# Altium PCB PCB2.PcbDoc
Units mm, origin at the board's own origin, x right, y up, seen from the top; angles counter-clockwise.
Board outline 50 x 50 mm, 2 copper layers (Top Layer, Bottom Layer); 59 components, 46 nets, 220 pads, 53 vias.
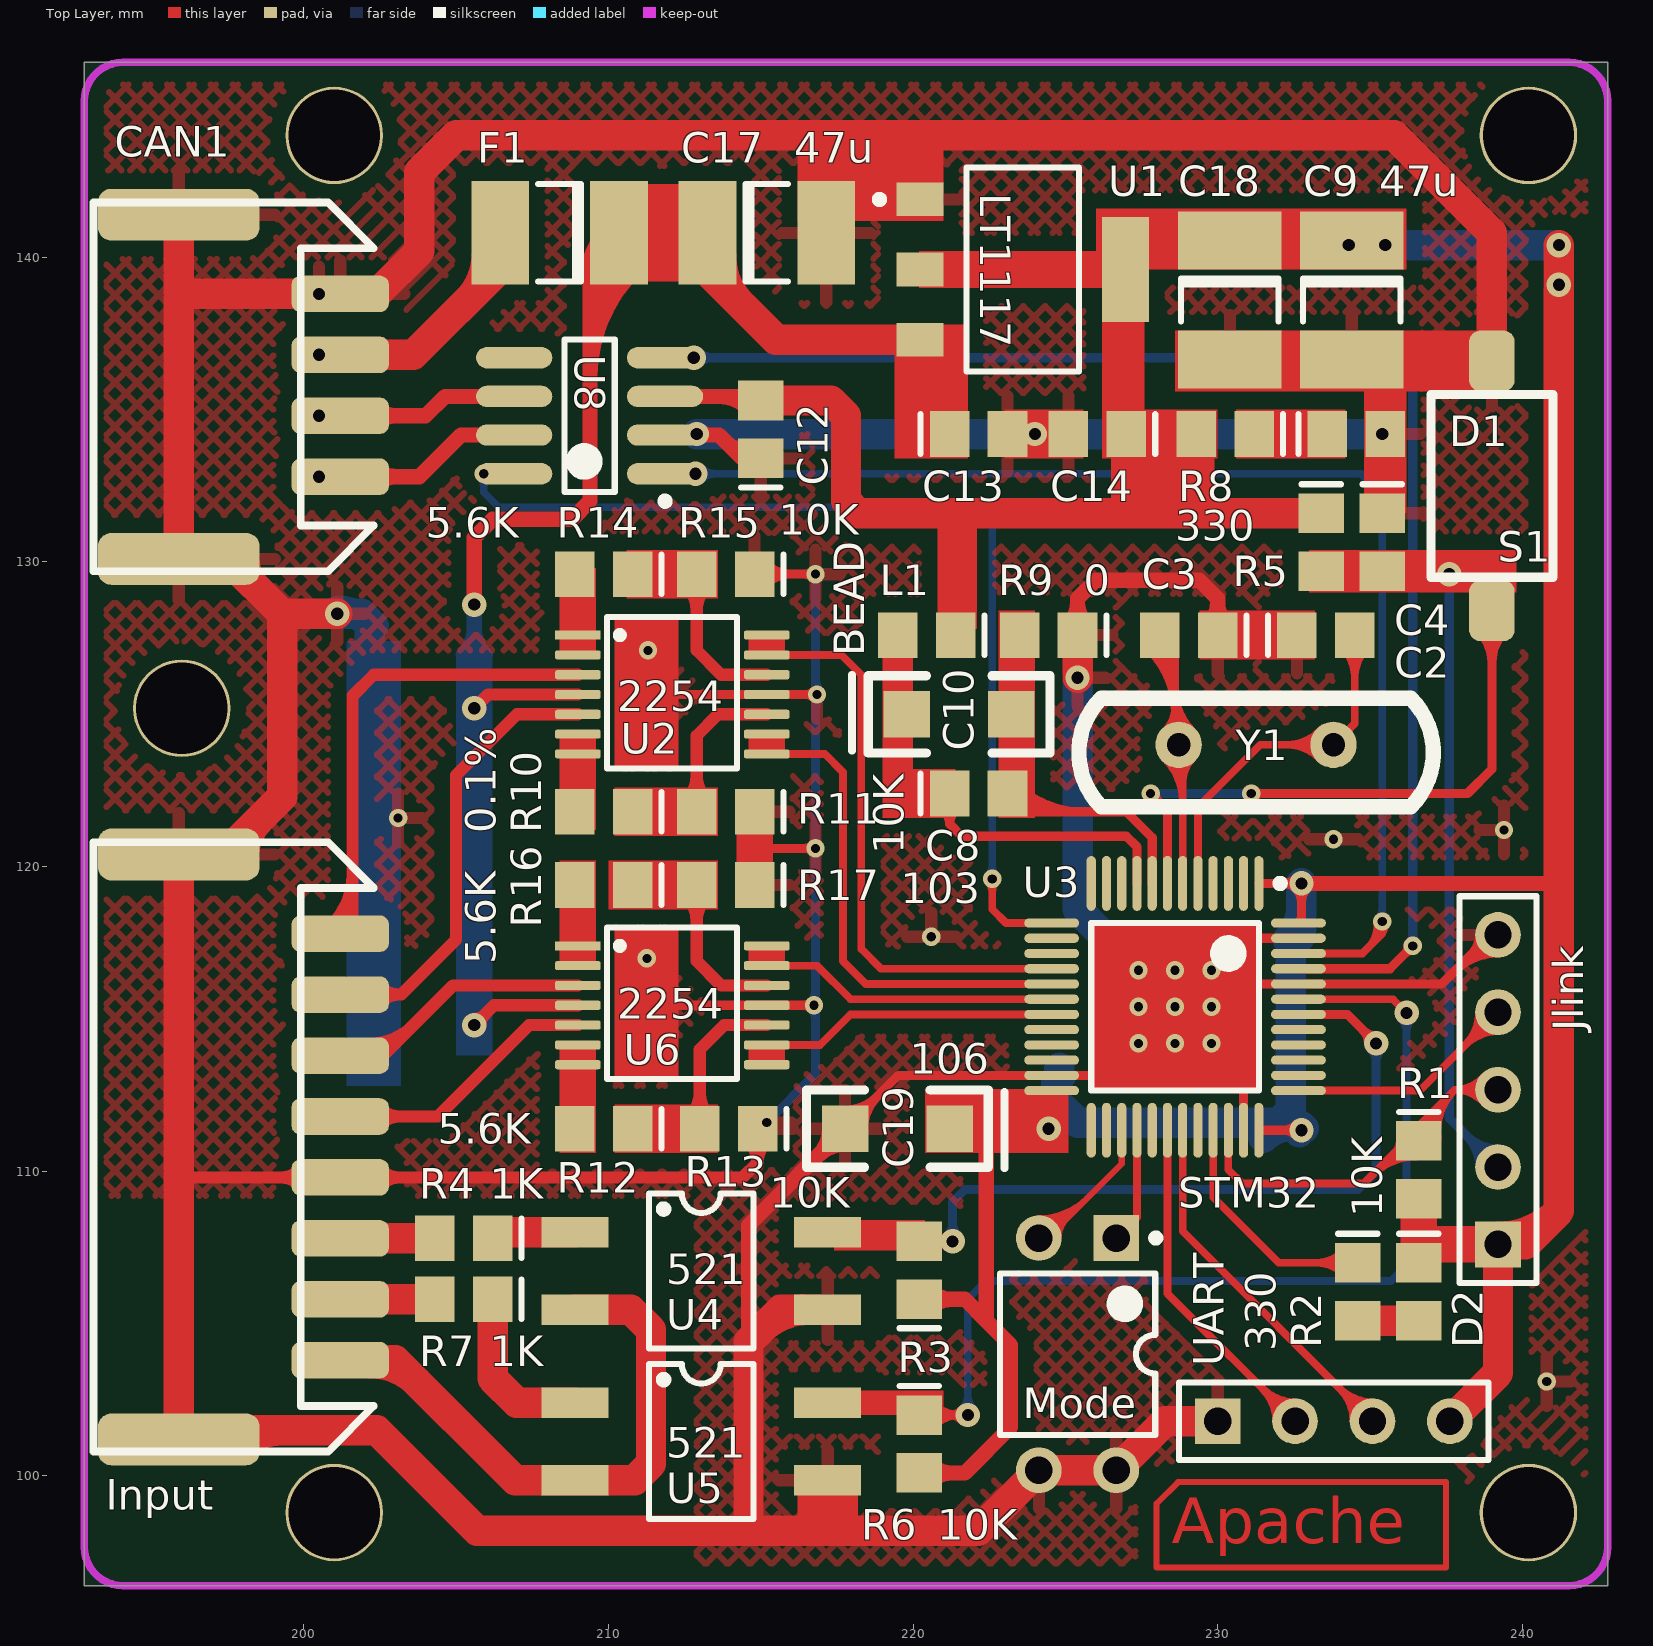
[diagram p0: Top Layer view]
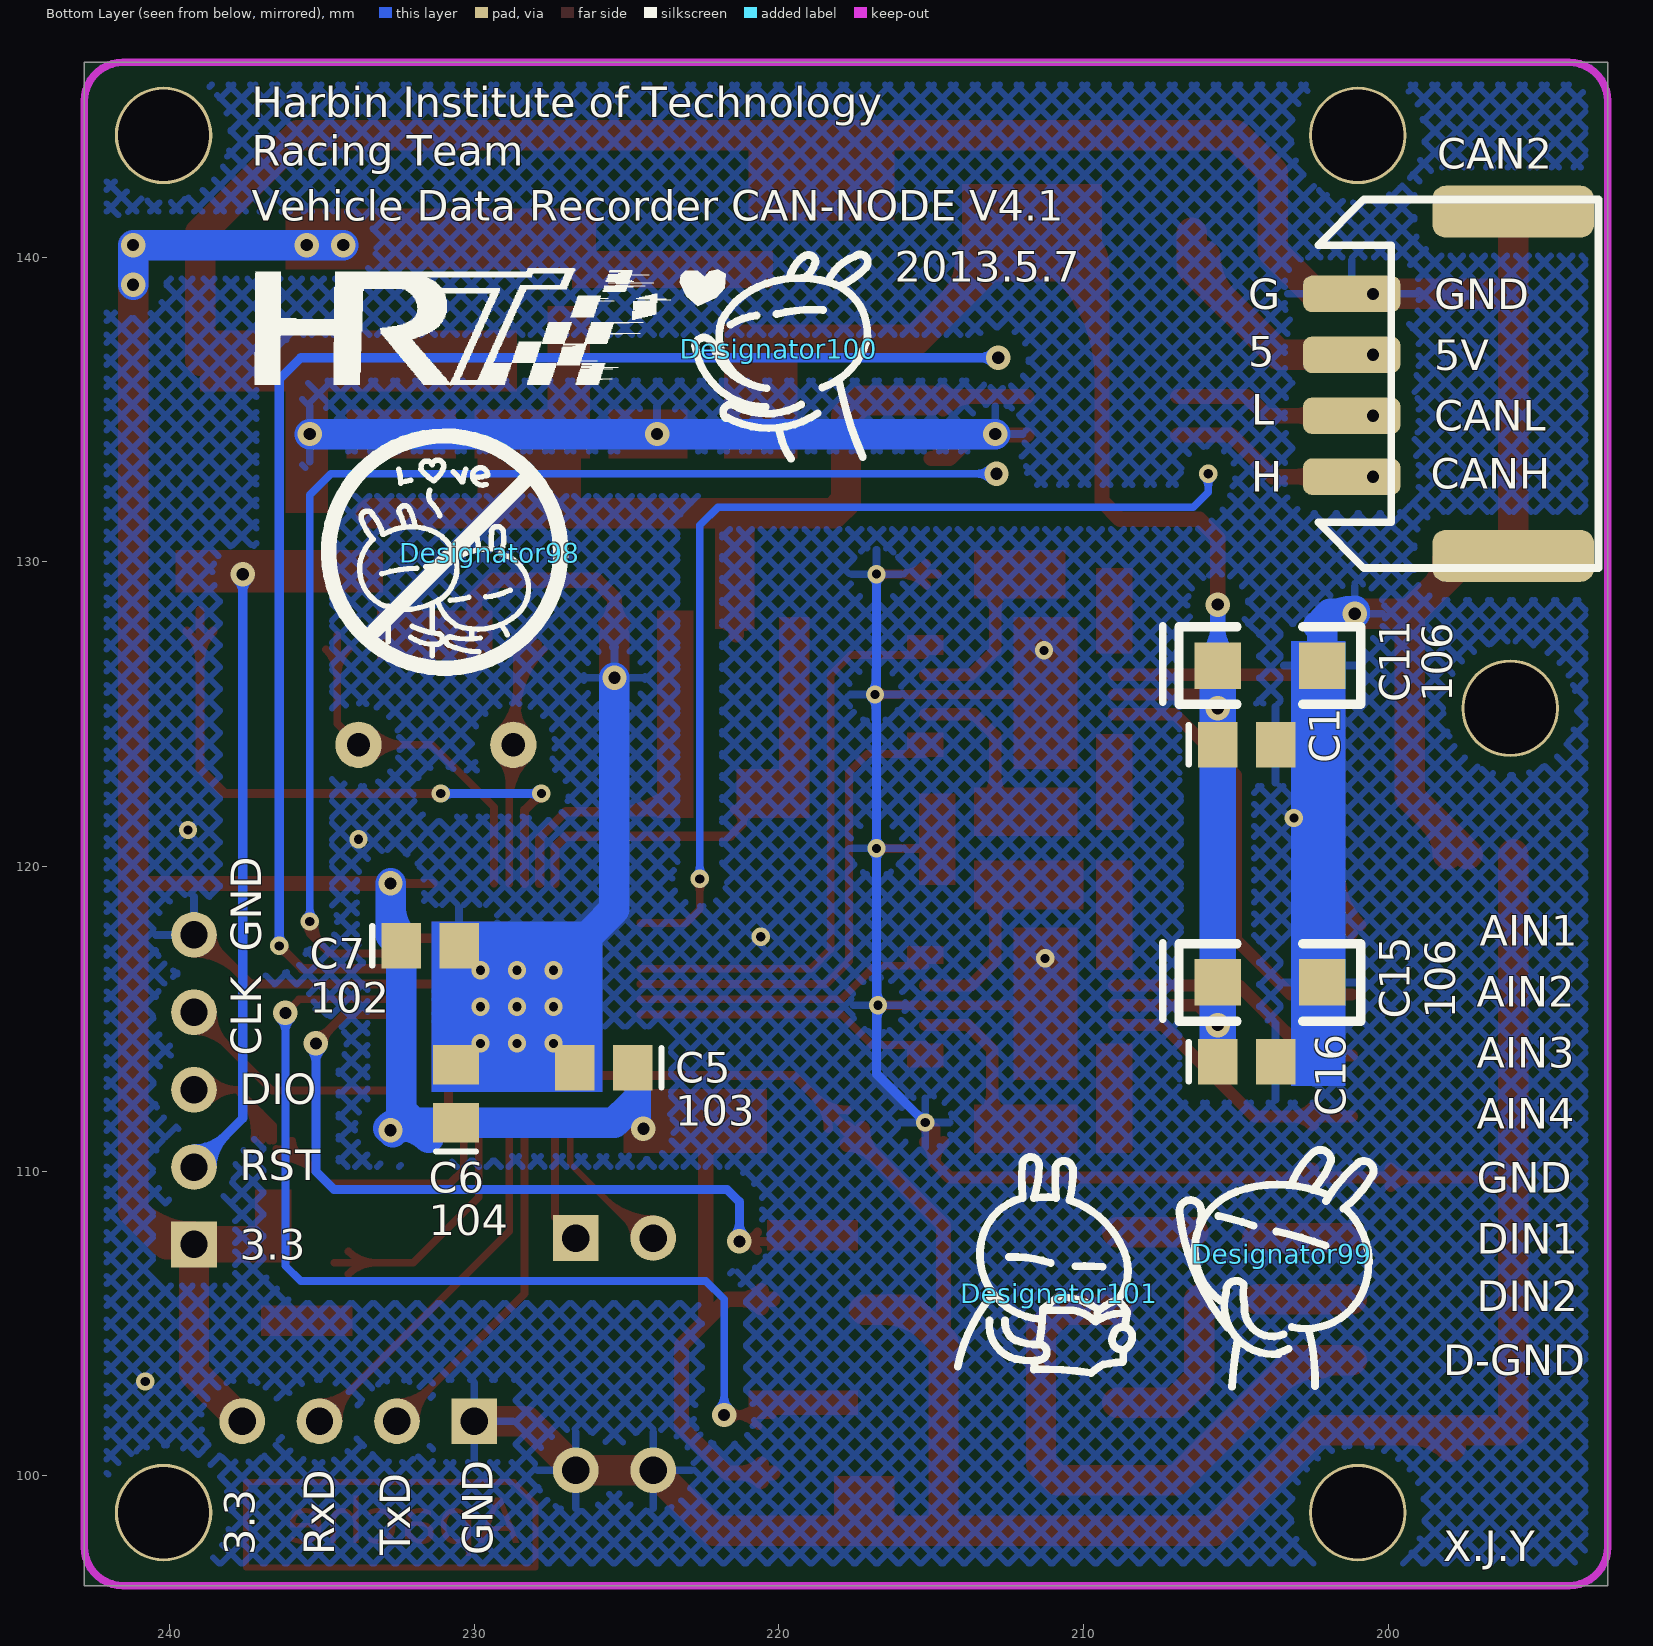
[diagram p1: Bottom Layer view, seen from below]

## Layer stack, top to bottom
Top Layer: signal copper 0.0356
Dielectric: dielectric 0.32, FR-4, Dk 4.8
Bottom Layer: signal copper 0.0356

## Board outline
192.8,146.4 242.8,146.4 242.8,96.4 192.8,96.4

## Design rules (kind name [scope] priority, off if disabled: settings)
Clearance Clearance_1 [(InPolygon)] p1: gap=0.5
Clearance [All] p2: gap=0.2
PolygonConnect [All] p1: connectstyle=Relief reliefconductorwidth=0.4 reliefentries=4 polygonreliefangle="90 Angle"
RoutingVias [All] p1: holewidth=0.5 width=1.2 viastyle="Through Hole" minholewidth=0.3 minwidth=0.8 maxholewidth=1 maxwidth=1.5
SilkscreenOverComponentPads [All] p1: minsilkscreentomaskgap=0.254
SolderMaskExpansion [All] p1: expansion=0.102
Width [All] p1: maxlimit=2.54 minlimit=0.178 preferedwidth=0.254
27 further rules are at their usual default settings.

## Components (designator, comment, footprint, x,y, rotation, side; value= is the part's Value field where it differs from the comment)
C1 "Cap" C0805 205.6,124 r180 bottom
C2 "Cap" C0805 232.6,127.6 r0 top
C3 "Cap" C0805 230,127.6 r180 top
C4 "Cap" C0805 235.4,131.6 r270 top
C5 "Cap" C0805 224.8,113.4 r0 bottom
C6 "Cap" C0805 230.6,111.6 r90 bottom
C7 "Cap" C0805 232.4,117.4 r180 bottom
C8 "Cap" C0805 221.2,122.4 r0 top
C9 "Cap Pol2" 1812 234.4,138.6 r270 top
C10 "Cap Pol1" 1206 219.8,125 r0 top
C11 "Cap Pol1" 1206 205.6,126.6 r180 bottom
C12 "Cap" C0805 215,133.4 r90 top
C13 "Cap" C0805 221.2,134.2 r0 top
C14 "Cap" C0805 227,134.2 r180 top
C15 "Cap Pol1" 1206 205.6,116.2 r180 bottom
C16 "Cap" C0805 205.6,113.6 r180 bottom
C17 "Cap Pol2" 1812 215.2,140.8 r0 top
C18 "Cap Pol2" 1812 230.4,138.6 r270 top
C19 "Cap Pol2" 1206 221.2,111.4 r180 top
CAN1 "Header 4" DuraClik*4 193.1,131.8 r270 top
CAN2 "Header 4" DuraClik*4 193.1,139.8 r90 bottom
D1 "LED2" C0805 233.6,134.2 r0 top
D2 "LED2" C0805 236.6,107 r270 top
Designator98 "Comment" TUSIJI_24 229.5,130.3 r180 bottom
Designator99 "Comment" TUSIJI_5 203.5,107.3 r180 bottom
Designator100 "Comment" TUSIJI_8 220,137 r180 bottom
Designator101 "Comment" TUSIJI_6 210.8,106 r180 bottom
F1 "Fuse 1" 1812 208.4,140.8 r180 top
Input "Header 8" DuraClik*8 193.1,110.8 r270 top
Jlink "Jlink" HDR1X5 239.2,107.6 r90 top
L1 "Inductor" C0805 221.4,127.6 r180 top
Mode "SW DIP-2" DIP-4 225.4,104 r270 top
R1 "Res2" C0805 236.6,111 r270 top
R2 "Res2" C0805 234.6,107 r270 top
R3 "Res2" C0805 220.2,105.8 r90 top
R4 "Res2" C0805 206.2,107.8 r180 top
R5 "Res2" C0805 233.4,131.6 r270 top
R6 "Res2" C0805 220.2,102 r270 top
R7 "Res2" C0805 206.2,105.8 r180 top
R8 "Res2" C0805 231.2,134.2 r180 top
R9 "Res2" C0805 225.4,127.6 r180 top
R10 "Res2" C0805 210.8,121.8 r180 top
R11 "Res2" C0805 214.8,121.8 r180 top
R12 "Res2" C0805 210.8,111.4 r180 top
R13 "Res2" C0805 214.9,111.4 r180 top
R14 "Res2" C0805 210.8,129.6 r180 top
R15 "Res2" C0805 214.8,129.6 r180 top
R16 "Res2" C0805 210.8,119.4 r180 top
R17 "Res2" C0805 214.8,119.4 r180 top
S1 "SW-PB" button_SMD 239,136.6 r270 top
U1 "REG1117-3.3" ZZ311 223.6,139.6 r270 top
U2 "TLV2254" TSSOP14 209,127.6 r270 top
U3 "STM32F103C8T6" LQFP48_N 228.6,115.4 r270 top
U4 "Optoisolator1" SOP4-large 209.4,108 r0 top
U5 "Optoisolator1" SOP4-large 209.4,102.4 r0 top
U6 "TLV2254" TSSOP14 209,117.4 r270 top
U8 "VP230" SOP127P600X175-8M 209.385,134.8 r180 top
UART "Header 4" HDR1X4 230,101.8 r0 top
Y1 "8M" XTAL 233.8,124 r180 top

## Footprints (in the part's own frame and the unit in brackets; to place one, negate y for a bottom-side part, rotate by r counter-clockwise, add the part's x,y. Pads: shape width x height; smd on the part's side, far side on the other; paste and mask are expansions set on the pad)
1206 [mil]
  rect 60x60 smd: 1(0,0) 2(135,0)
  silkscreen extent -71,-50 185,51
1812 [mm]
  rect 1.9x3.4 smd: 1(-1.95,0) 2(1.95,0)
  silkscreen extent -0.7,-1.6 0.7,1.6
button_SMD [mm]
  rrect50% 2x1.5 smd: 1(0,0) 2(8.2,0)
  silkscreen extent 1.1,-2 7.1,2
C0805 [mm]
  rect 1.3x1.5 smd: 1(0,0) 2(1.9,0)
  silkscreen extent -0.95,-0.65 -0.95,0.65
DIP-4 [mm] "DIP; 4 Leads; Row Spacing 7.62 mm; Pitch 2.54 mm"
  rect 1.5x1.5 hole 0.9: 1(-3.81,1.27)
  round 1.5 hole 0.9: 2(-3.81,-1.27) 3(3.81,-1.27) 4(3.81,1.27)
  silkscreen extent -3.93,-2.55 2.65,2.7, body extent -3.15,-2.5 3.15,2.5, height 5.6
DuraClik*4 [mm]
  rrect50% 1.7x5.3 smd: 0(-9.6,2.8) 0(1.7,2.8)
  rrect50% 1.2x3.2 smd: 1(-7,8.1) 2(-5,8.1) 3(-3,8.1) 4(-1,8.1)
  silkscreen extent -10,0 2.1,9.2
DuraClik*8 [mm]
  rrect50% 1.7x5.3 smd: 0(-9.6,2.8) 0(9.6,2.8)
  rrect50% 1.2x3.2 smd: 1(-7,8.1) 2(-5,8.1) 3(-3,8.1) 4(-1,8.1) 5(1,8.1) 6(3,8.1) 7(5,8.1) 8(7,8.1)
  silkscreen extent -10,0 10,9.2
HDR1X4 [mm] "Connector; Header; 4 Position"
  rect 1.5x1.5 hole 0.9: 1(0,0)
  round 1.5 hole 0.9: 2(2.54,0) 3(5.08,0) 4(7.62,0)
  silkscreen extent -1.27,-1.27 8.89,1.27
HDR1X5 [mm] "Connector; Header; 5 Position"
  rect 1.5x1.5 hole 0.9: 1(0,0)
  round 1.5 hole 0.9: 2(2.54,0) 3(5.08,0) 4(7.62,0) 5(10.16,0)
  silkscreen extent -1.27,-1.27 11.43,1.27
LQFP48_N [mm] "Thin QFP, 48-Leads, Body 7x7mm, Pitch 0.5mm, IPC Medium Density"
  oval 1.8x0.3 smd: 1(-4.05,2.75) 2(-4.05,2.25) 3(-4.05,1.75) 4(-4.05,1.25) 5(-4.05,0.75) 6(-4.05,0.25) 7(-4.05,-0.25) 8(-4.05,-0.75) 9(-4.05,-1.25) 10(-4.05,-1.75) 11(-4.05,-2.25) 12(-4.05,-2.75) 25(4.05,-2.75) 26(4.05,-2.25) 27(4.05,-1.75) 28(4.05,-1.25) 29(4.05,-0.75) 30(4.05,-0.25) 31(4.05,0.25) 32(4.05,0.75) 33(4.05,1.25) 34(4.05,1.75) 35(4.05,2.25) 36(4.05,2.75)
  oval 0.3x1.8 smd: 13(-2.75,-4.05) 14(-2.25,-4.05) 15(-1.75,-4.05) 16(-1.25,-4.05) 17(-0.75,-4.05) 18(-0.25,-4.05) 19(0.25,-4.05) 20(0.75,-4.05) 21(1.25,-4.05) 22(1.75,-4.05) 23(2.25,-4.05) 24(2.75,-4.05) 37(2.75,4.05) 38(2.25,4.05) 39(1.75,4.05) 40(1.25,4.05) 41(0.75,4.05) 42(0.25,4.05) 43(-0.25,4.05) 44(-0.75,4.05) 45(-1.25,4.05) 46(-1.75,4.05) 47(-2.25,4.05) 48(-2.75,4.05)
  silkscreen extent -4.17,-2.75 2.75,3.58, body extent -3.5,-3.5 3.5,3.5, height 1.6
SOP4-large [mm]
  rect 2.2x1 smd: 1(-0.5,0) 2(-0.5,-2.54) 3(7.8,-2.54) 4(7.8,0)
  silkscreen extent 1.93,-3.81 5.37,1.27
SOP127P600X175-8M [mm] "SOP, 8-Leads, Body 5.0x4.0mm (max), Pitch 1.27mm, IPC Low Density"
  oval 2.5x0.7 smd: 1(-2.475,1.905) 2(-2.475,0.635) 3(-2.475,-0.635) 4(-2.475,-1.905) 5(2.475,-1.905) 6(2.475,-0.635) 7(2.475,0.635) 8(2.475,1.905)
  silkscreen extent -2.6,-2.5 0.83,2.93, body extent -2,-2.5 2,2.5, height 1.75
TSSOP14 [mm]
  rect 0.3x1.5 smd: 1(0,0)
  rrect50% 0.3x1.5 smd: 2(0.65,0) 3(1.3,0) 4(1.95,0) 5(2.6,0) 6(3.25,0) 7(3.9,0) 8(3.9,6.2) 9(3.25,6.2) 10(2.6,6.2) 11(1.95,6.2) 12(1.3,6.2) 13(0.65,6.2) 14(0,6.2)
  silkscreen extent -0.6,0.95 4.38,5.23
TUSIJI_5 [mm] "TSJ"
  silkscreen extent -3.36,-4.37 3.02,3.4
TUSIJI_6 [mm] "TSJ"
  silkscreen extent -3.33,-2.63 2.4,4.47
TUSIJI_8 [mm] "TSJ"
  silkscreen extent -3.25,-3.61 2.92,3.1
TUSIJI_24 [mm] "TSJ"
  silkscreen extent -5.28,-3.78 2.34,3.84
XTAL [mil]
  round 60 hole 30: 1(200,0) 2(0,0)
  silkscreen extent -129,-60 329,80
ZZ311 [mm] "SOT-223/SC-73; 4 Leads; Body 6.7 x 7.3 mm, inc. leads (LxW max)"
  rect 1.1x1.55 smd: 1(-2.3,-3.375) 2(0,-3.375) 3(2.3,-3.375)
  rect 3.45x1.55 smd: 4(0,3.375)
  silkscreen extent -3.35,-4.82 3.35,1.85

## Part data
C1 C2 C3 C4 C5 C6 C7 C8 C12 C13 C14 C16: "Capacitor"
C9 C17 C18 C19: "Polarized Capacitor (Axial)"
C10 C11 C15: "Polarized Capacitor (Radial)"
CAN1 CAN2 UART: "Header, 4-Pin"
D1 D2: "Typical RED, GREEN, YELLOW, AMBER GaAs LED"
F1: "Fuse"
Input: "Header, 8-Pin"
Jlink: library part "Header 5", "Header, 5-Pin"
Mode: "DIP Switch, 2 Position, SPST"
R1 R2 R3 R4 R5 R6 R7 R8 R9 R10 R11 R12 R13 R14 R15 R16 R17: "Resistor"
S1: "Switch"
U1: "800mA and 1A Low Dropout Positive Regulator 2.85V, 3.3V, 5V, and Adjustable"
U3: "STM32 ARM-based 32-bit MCU with 64 Kbytes Flash, 48-pin LQFP, Industrial Temperature"
U4 U5: "4-Pin Phototransistor Optocoupler"
U8: "3.3-VCANTRANSCEIVERS"
Y1: library part XTAL, "Crystal Oscillator"

## Free pads (board coordinates)
  round 3.2 hole 3: 0(201,98.8) 1(240.2,98.8) 2(240.2,144) 3(201,144) 4(196,125.2)

## Via types
v1: diameter 0.6, hole 0.3, Top Layer to Bottom Layer, 27 vias
v2: diameter 0.8, hole 0.4, Top Layer to Bottom Layer, 26 vias

## Nets (pads, with @x,y where several pads share a name; then routed paths per layer and width w, separated by ;. In a path a pad name is that pad's centre, name@x,y a point inside that pad or via, vN(x,y) a via of type N, cw(c..) or ccw(c..) an arc to the next point about the centre after c; other vN are vias at no path point)
ADDRESS1: Mode.2 U3.27 | length 9.4
  Top Layer w0.203: Mode.2@224.13,108.052 ccw(c224.13,109.312) 225.021,108.421 ; Mode.2@224.13,108.255 ccw(c224.13,110.006) 225.368,108.768 ; Mode.2@224.13,108.458 ccw(c224.13,110.7) 225.715,109.115 ; Mode.2@224.41,107.81 226.85,110.25 U3.27 ; Mode.2@224.778,107.81 cw(c225.668,107.81) 225.039,108.439
ADDRESS2: Mode.1 U3.28 | length 3.8
  Top Layer w0.254: Mode.1 227.35,108.49 U3.28
AGND: C8.2 C10.2 R9.2 U3.8 | length 11.9
  Top Layer w0.3: C8.2@223.029,122.229 ccw(c224.066,123.266) 224.066,121.8 ; C8.2@223.1,122.2 223.5,121.8 227,121.8 227.85,120.95 U3.8 ; C8.2@223.241,122.441 ccw(c224.79,123.99) 224.79,121.8 ; C8.2@223.454,122.654 ccw(c225.514,124.714) 225.514,121.8
CAN_EN: U3.13 U8.8 | length 34.5
  Top Layer w0.254: v1@222.478,119.478 cw(c222.182,119.182) 222.6,119.182 cw(c223.018,119.182) v1@222.722,119.478 ; v1(222.6,119.6) 222.6,118.6 223.05,118.15 U3.13
  Bottom Layer w0.254: v1@205.788,132.773 cw(c205.493,132.478) 205.91,132.478 cw(c206.328,132.478) v1@206.033,132.773 ; v1(205.91,132.895) 205.91,132.29 206.4,131.8 222,131.8 222.6,131.2 v1(222.6,119.6) ; v1@222.478,119.722 ccw(c222.182,120.018) 222.6,120.018 ccw(c223.018,120.018) v1@222.722,119.722
CAN_H: CAN1.4 CAN2.1 U8.7 | length 7.6
  Top Layer w0.5: CAN1.4 203.8,132.8 205.165,134.165 U8.7 ; CAN1.4@202.447,132.552 cw(c203.045,131.955) 203.045,132.8 cw(c203.045,133.645) CAN1.4@202.447,133.047
  other v2: 200.5,132.8
CAN_L: CAN1.3 CAN2.2 U8.6 | length 7.3
  Top Layer w0.5: CAN1.3 204,134.8 204.635,135.435 U8.6 ; CAN1.3@202.447,134.553 cw(c203.045,133.955) 203.045,134.8 cw(c203.045,135.645) CAN1.3@202.447,135.047
  other v2: 200.5,134.8
DIGITAL_IN1: Input.6 R4.2 | length 3.1
  Top Layer w1: Input.6 R4.2
DIGITAL_IN2: Input.7 R7.2 | length 3.1
  Top Layer w1: Input.7 R7.2
GND: C1.2 C2.1 C3.1 C4.1 C5.2 C6.2 C7.2 C9.2 C11.2 C12.1 C13.2 C14.2 C15.2 C16.2 C17.2 C18.2 C19.2 CAN1.0 CAN1.1 CAN2.4 D1.2 Input.0 Input.5 Jlink.5 Mode.3 Mode.4 R9.1 R11.1 R13.1 R15.1 R17.1 S1.1 U1.1 U2.11 U3.23 U3.35 U3.44 U3.47 U4.3 U5.3 U6.11 U8.2 UART.1 | length 311.5
  Top Layer w0.3: 211.3,125.65 U2.11 v1(216.85,125.65) ; 211.5,115.45 U6.11 v1(216.75,115.45) ; 214.8,120.6 v1(216.8,120.6) ; R15.1 v1(216.8,129.6) ; R15.1@215.154,129.246 cw(c216.007,128.393) 216.007,129.6 cw(c216.007,130.807) R15.1@215.154,129.954 ; v1@216.644,115.344 ccw(c216.388,115.088) 216.388,115.45 ccw(c216.388,115.812) v1@216.644,115.556 ; v1@216.694,120.494 ccw(c216.438,120.238) 216.438,120.6 ccw(c216.438,120.962) v1@216.694,120.706 ; v1@216.694,129.494 ccw(c216.438,129.238) 216.438,129.6 ccw(c216.438,129.962) v1@216.694,129.706 ; v1@216.744,125.544 ccw(c216.488,125.288) 216.488,125.65 ccw(c216.488,126.012) v1@216.744,125.756 ; C19.2 219.521,113.15 U3.23 226.85,113.15 ; C19.2@217.771,112.012 ccw(c217.771,113.49) 218.816,112.445 ccw(c219.861,111.4) C19.2@218.383,111.4 ; 229.75,117.65 U3.47 ; 229.85,116.15 U3.44 237.35,116.15 238.96,117.76 Jlink.5 ; U3.35 230.85,113.15 ; 237.766,116.566 cw(c239.2,115.132) Jlink.5@239.2,117.16 ; 238.278,117.078 cw(c239.2,116.156) Jlink.5@239.2,117.46 ; 238.345,117.145 ccw(c237.731,117.76) Jlink.5@238.6,117.76
  Top Layer w0.4: 196.1,109.8 Input.5 214.4,109.8 214.9,110.3 ; Input.5@199.917,109.517 ccw(c199.234,108.834) 199.234,109.8 ccw(c199.234,110.766) Input.5@199.917,110.083 ; Input.5@202.483,109.517 cw(c203.166,108.834) 203.166,109.8 cw(c203.166,110.766) Input.5@202.483,110.083 ; R13.1@214.602,110.963 cw(c214.014,110.3) 214.9,110.3 ; 214.9,110.634 cw(c216.166,110.634) R13.1@215.271,111.529 ; R13.1 214.9,110.3 ; R13.1@215.198,110.963 ccw(c215.786,110.3) 214.9,110.3
  Top Layer w0.5: U8.2 213.635,134.165 214.4,133.4 C12.1 ; U8.2@212.454,134.165 ccw(c212.454,134.646) U8.2@212.794,134.306 ; U8.2@213.006,134.306 ccw(c213.346,134.646) 213.346,134.165 ; 213.885,133.915 ccw(c214.418,134.449) C12.1@214.733,133.763 ; 214.6,104.4 214.6,108.229 C19.2 ; C19.2@217.259,111.4 cw(c216.023,111.4) 216.897,110.526 cw(c217.771,109.652) C19.2@217.771,110.888 ; R9.1@225.117,127.983 ccw(c224.434,128.666) 225.4,128.666 ccw(c226.366,128.666) R9.1@225.683,127.983 ; R9.1 225.4,128.8 226,129.4 229.4,129.4 230,128.8 C3.1 ; C3.1@229.717,127.983 ccw(c229.034,128.666) 230,128.666 ccw(c230.966,128.666) C3.1@230.283,127.983
  Top Layer w1: Input.0@195.9,120.4 195.9,101.5 202.4,101.5 205.7,98.2 214.8,98.2 ; 195.9,138.8 CAN1.1 202.4,138.8 203.8,140.2 203.8,142.8 205,144 235.8,144 239,140.8 S1.1 ; CAN1.0@195.9,141.4 195.9,130.1 197.5,130.1 199.3,128.3 ; Input.0@197.4,120.4 199.3,122.3 199.3,128.3 ; Input.0@197.947,100.953 cw(c199.269,99.631) 199.269,101.5 ; Input.0@198.05,120.4 cw(c199.619,120.4) 198.51,121.51 ; CAN1.0@198.05,130.1 ccw(c199.378,130.1) 198.439,129.161 ; v2(201.1,128.3) 199.3,128.3 ; 214.995,104.795 cw(c216.6,103.191) 216.6,105.46 ccw(c216.365,103.815) 215.19,104.99 ; U4.3 215.66,105.46 214.6,104.4 214.6,98.4 214.8,98.2 ; v2(225.4,126.2) R9.1 ; UART.1 228.28,101.8 Mode.4 Mode.3 222.14,98.2 214.8,98.2
  Bottom Layer w0.3: v1(215.2,111.6) 216.8,113.2 v1(216.8,120.6) v1(216.8,129.6) ; v1@215.2,111.75 ccw(c215.2,112.112) 215.456,111.856 ccw(c215.712,111.6) v1@215.35,111.6 ; v1@216.644,115.344 cw(c216.267,114.967) 216.8,114.967 ; v1@216.644,115.556 ccw(c216.267,115.933) 216.8,115.933 ; v1@216.694,120.494 cw(c216.438,120.238) 216.8,120.238 cw(c217.162,120.238) v1@216.906,120.494 ; v1@216.694,120.706 ccw(c216.438,120.962) 216.8,120.962 ccw(c217.162,120.962) v1@216.906,120.706 ; v1@216.694,129.494 cw(c216.438,129.238) 216.8,129.238 cw(c217.162,129.238) v1@216.906,129.494 ; 216.8,125.167 cw(c217.333,125.167) v1@216.956,125.544 ; 216.8,126.133 ccw(c217.333,126.133) v1@216.956,125.756
  Bottom Layer w1: v2(201.1,128.3) 201.9,128.3 202.171,128.029 C11.2 ; v2(212.9,134.2) v2(224,134.2) v2(235.4,134.2) ; v2(225.4,126.2) 225.4,118.6 226.1,117.9 ; v2@201.1,128.4 cw(c201.1,126.71) 202.295,127.905 ccw(c201.1,126.71) v2@201.1,128.4
  other v1: 240.8,103.1 227.4,114.2 228.6,114.2 229.8,114.2 227.4,115.4 228.6,115.4 229.8,115.4 227.4,116.6 228.6,116.6 229.8,116.6 211.264,116.989 220.6,117.7 233.8,120.9 239.4,121.2 203.1,121.6 211.3,127.1
  other v2: 200.5,138.8
GND-SENSOR: Input.8 U4.2 U5.2 | length 22.2
  Top Layer w1: Input.8 203,103.8 206.94,99.86 U5.2 210.86,99.86 211.4,100.4 211.4,104.8 210.74,105.46 U4.2 ; Input.8@202.2,103.7 cw(c202.2,101.527) 203.736,103.064 ; Input.8@202.227,103.704 cw(c202.556,102.556) 203.4,103.4
LED0: R2.1 U3.33 | length 9.8
  Top Layer w0.254: U3.33 229.85,109.15 232,107 R2.1 ; R2.1@234.13,106.63 ccw(c233.237,105.737) 233.237,107 ccw(c233.237,108.263) R2.1@234.13,107.37
NetC2_2: C2.2 U3.5 Y1.2 | length 17.5
  Top Layer w0.254: U3.5 229.35,121.95 231.4,124 Y1.2 234.5,124.7 C2.2 ; Y1.2@233.351,123.551 ccw(c232.267,122.467) 232.267,124 ccw(c232.267,125.533) Y1.2@233.351,124.449 ; Y1.2@233.531,123.731 ccw(c232.88,123.08) 232.88,124 ccw(c232.88,124.92) Y1.2@233.531,124.269 ; C2.2@234.13,127.13 cw(c233.237,126.237) 234.5,126.237 cw(c235.763,126.237) C2.2@234.87,127.13
NetC3_2: C3.2 U3.6 Y1.1 | length 21.6
  Top Layer w0.254: C3.2@227.73,127.13 cw(c225.63,125.03) 228.6,125.03 ; C3.2@227.91,127.31 cw(c226.243,125.643) 228.6,125.643 ; C3.2@228.089,127.489 cw(c226.857,126.257) 228.6,126.257 ; C3.2 228.6,127.1 228.6,124.12 Y1.1 ; C3.2@228.269,127.669 cw(c227.47,126.87) C3.2@228.6,126.87 ; Y1.1@228.271,123.551 cw(c226.873,122.153) 228.85,122.153 ; Y1.1@228.271,124.449 ccw(c227.477,125.243) 228.6,125.243 ; Y1.1@228.451,123.731 cw(c227.486,122.766) 228.85,122.766 ; 228.6,125.21 ccw(c229.93,125.21) Y1.1@228.989,124.269 ; 228.6,125.823 ccw(c230.543,125.823) Y1.1@229.169,124.449 ; U3.6 Y1.1@228.85,123.87 ; 228.85,122.781 cw(c229.939,122.781) Y1.1@229.169,123.551
NetC8_1: C8.1 C10.1 L1.2 U3.9 | length 9.6
  Top Layer w0.3: C8.1@220.936,121.875 cw(c220.64,121.4) 221.2,121.4 ; C8.1@221.2,122.2 221.2,121.4 ; C8.1@221.464,121.875 ccw(c221.76,121.4) 221.2,121.4 ; U3.9 227.35,120.65 227,121 221.6,121 221.2,121.4
NetD1_1: D1.1 R8.1
NetD2_2: D2.2 R2.2
NetR4_1: R4.1 U4.1 | length 2.5
  Top Layer w1: R4.1@206.4,108 U4.1
NetR7_1: R7.1 U5.1 | length 5.6
  Top Layer w1: R7.1 206.2,103.2 207,102.4 U5.1
NetR10_1: R10.1 R11.2 U2.10 | length 6.8
  Top Layer w0.4: R11.2@212.582,122.218 ccw(c211.814,122.986) 212.9,122.986 ccw(c213.986,122.986) R11.2@213.218,122.218 ; R11.2 212.9,124.3 213.6,125 U2.10
NetR10_2: R10.2 U2.6 U2.7
NetR12_1: R12.1 R13.2 U6.10 | length 6.8
  Top Layer w0.4: R13.2@212.682,111.818 ccw(c211.914,112.586) 213,112.586 ccw(c214.086,112.586) R13.2@213.318,111.818 ; R13.2 213,114 213.8,114.8 U6.10
NetR12_2: R12.2 U6.6 U6.7
NetR14_1: R14.1 R15.2 U2.12 | length 6.8
  Top Layer w0.4: R15.2@212.582,129.182 cw(c211.814,128.414) 212.9,128.414 cw(c213.986,128.414) R15.2@213.218,129.182 ; R15.2 212.9,127.1 213.7,126.3 U2.12
NetR14_2: R14.2 U2.1 U2.2
NetR16_1: R16.1 R17.2 U6.12 | length 6.8
  Top Layer w0.4: R17.2@212.582,118.982 cw(c211.814,118.214) 212.9,118.214 cw(c213.986,118.214) R17.2@213.218,118.982 ; R17.2 212.9,116.9 213.7,116.1 U6.12
NetR16_2: R16.2 U6.1 U6.2
NRST: C4.2 Jlink.2 R5.2 S1.2 U3.7 | length 47.8
  Top Layer w0.3: v1@227.8,122.25 cw(c227.8,121.888) 228.056,122.144 cw(c228.312,122.4) v1@227.95,122.4 ; v1(227.8,122.4) 228.35,121.85 U3.7 ; v1(231.1,122.4) 238.2,122.4 239,123.2 S1.2 ; v1@231.206,122.294 cw(c231.462,122.038) 231.462,122.4 cw(c231.462,122.762) v1@231.206,122.506 ; S1.2@238.576,127.726 cw(c237.551,126.701) 239,126.701 cw(c240.449,126.701) S1.2@239.424,127.726
  Bottom Layer w0.3: v1(227.8,122.4) v1(231.1,122.4) ; v1@227.906,122.294 cw(c228.162,122.038) 228.162,122.4 cw(c228.162,122.762) v1@227.906,122.506 ; v1@230.994,122.294 ccw(c230.738,122.038) 230.738,122.4 ccw(c230.738,122.762) v1@230.994,122.506 ; v2@237.423,129.423 cw(c236.996,128.996) 237.6,128.996 cw(c238.204,128.996) v2@237.777,129.423 ; v2(237.6,129.6) 237.6,111.74 Jlink.2 ; 238.176,111.164 ccw(c239.2,112.189) Jlink.2@239.2,110.74 ; 238.176,111.164 cw(c237.151,110.14) Jlink.2@238.6,110.14
PA11_CANRX: U3.45 U8.4 | length 48.6
  Top Layer w0.3: U3.45 235.65,116.65 v1(236.4,117.4) ; v1@236.25,117.4 cw(c235.888,117.4) 236.144,117.144 cw(c236.4,116.888) v1@236.4,117.25
  Bottom Layer w0.3: v2(212.8,136.705) 235.695,136.705 236.4,136 v1(236.4,117.4) ; v2@212.977,136.529 cw(c213.404,136.102) 213.404,136.705 cw(c213.404,137.309) v2@212.977,136.882 ; v1@236.294,117.506 ccw(c236.038,117.762) 236.4,117.762 ccw(c236.762,117.762) v1@236.506,117.506
PA12_CANTX: U3.46 U8.1 | length 43.4
  Top Layer w0.254: U3.46 234.75,117.15 235.4,117.8 v1(235.4,118.2) ; 234.95,117.35 ccw(c234.256,118.044) v1@235.229,118.177 ; 235.312,117.712 ccw(c234.893,118.131) v1@235.48,118.211
  Bottom Layer w0.254: v2(212.86,132.895) 234.705,132.895 235.4,132.2 v1(235.4,118.2) ; v2@213.053,132.702 cw(c213.519,132.236) 213.519,132.895 cw(c213.519,133.554) v2@213.053,133.088 ; v1@235.278,118.322 ccw(c234.982,118.618) 235.4,118.618 ccw(c235.818,118.618) v1@235.522,118.322
PA13_SWDIO: Jlink.3 R1.1 U3.34 | length 22.1
  Top Layer w0.254: U3.34 230.35,110.05 230.8,109.6 234.8,109.6 236,110.8 R1.1@236,111 ; 235.095,109.895 cw(c236.5,108.49) R1.1@236.5,110.477 ; 235.529,110.329 cw(c236.5,109.357) R1.1@236.5,110.731 ; 235.819,110.619 ccw(c235.439,111) R1.1@235.977,111 ; R1.1 236.6,111.5 237.78,112.68 ; R1.1@236.715,111.002 cw(c237.844,111.136) 237.04,111.94 ; R1.1@236.967,111.032 cw(c238.505,111.215) 237.41,112.31 ; R1.1@237.219,111.062 cw(c239.167,111.293) 237.78,112.68 ; Jlink.3@238.742,112.258 ccw(c237.78,111.373) 237.78,112.68 ; Jlink.3@238.742,113.102 cw(c237.78,113.987) 237.78,112.68 ; Jlink.3@238.928,112.43 ccw(c238.359,111.906) 238.359,112.68 ccw(c238.359,113.454) Jlink.3@238.928,112.93 ; Jlink.3 237.78,112.68
PA14_SWDCLK: Jlink.4 U3.37 | length 11.4
  Top Layer w0.254: U3.37 236.63,112.65 Jlink.4 ; Jlink.4@238.577,115.22 cw(c237.073,115.22) 238.136,114.156 cw(c239.2,113.093) Jlink.4@239.2,114.597 ; Jlink.4@238.831,115.22 cw(c237.94,115.22) 238.57,114.59 cw(c239.2,113.96) Jlink.4@239.2,114.851
RX: U3.31 UART.3 | length 15.9
  Top Layer w0.254: U3.31 228.85,108.03 UART.3 ; UART.3@234.457,101.8 ccw(c232.953,101.8) 234.016,102.864 ccw(c235.08,103.927) UART.3@235.08,102.423 ; UART.3@234.711,101.8 ccw(c233.82,101.8) 234.45,102.43 ccw(c235.08,103.06) UART.3@235.08,102.169
TIM4_CH1: R3.2 U3.42 U4.4 | length 29
  Top Layer w0.3: R3.2 v2(221.3,107.7) ; R3.2@220.7,107.4 cw(c221.3,106.95) v2(221.3,107.7) cw(c221.3,108.45) R3.2@220.7,108 ; v2@221.123,107.523 ccw(c220.696,107.096) 220.696,107.7 ccw(c220.696,108.304) v2@221.123,107.877 ; U3.42 234.25,115.15 v2(235.2,114.2) ; v2@234.95,114.2 ccw(c234.346,114.2) 234.773,114.627 ccw(c235.2,115.054) v2@235.2,114.45
  Bottom Layer w0.3: v2@221.123,107.877 ccw(c220.696,108.304) 221.3,108.304 ccw(c221.904,108.304) v2@221.477,107.877 ; v2(221.3,107.7) 221.3,109 221.7,109.4 234.6,109.4 235.2,110 v2(235.2,114.2) ; v2@235.023,114.023 cw(c234.596,113.596) 235.2,113.596 cw(c235.804,113.596) v2@235.377,114.023
TIM4_CH2: R6.1 U3.43 U5.4 | length 37.4
  Top Layer w0.254: R6.1 v2(221.8,102) ; R6.1@220.67,101.63 cw(c221.563,100.737) 221.563,102 cw(c221.563,103.263) R6.1@220.67,102.37 ; v2@221.607,101.807 ccw(c221.141,101.341) 221.141,102 ccw(c221.141,102.659) v2@221.607,102.193 ; U3.43 235.75,115.65 v2(236.2,115.2)
  Bottom Layer w0.254: v2@221.607,102.193 ccw(c221.141,102.659) 221.8,102.659 ccw(c222.459,102.659) v2@221.993,102.193 ; v2(221.8,102) 221.8,105.8 222.4,106.4 235.7,106.4 236.2,106.9 v2(236.2,115.2) ; v2@236.007,115.007 cw(c235.541,114.541) 236.2,114.541 cw(c236.859,114.541) v2@236.393,115.007
TX: U3.30 UART.2 | length 15
  Top Layer w0.254: U3.30 228.35,105.99 UART.2 ; UART.2@231.917,101.8 ccw(c230.413,101.8) 231.476,102.864 ccw(c232.54,103.927) UART.2@232.54,102.423 ; UART.2@232.171,101.8 ccw(c231.28,101.8) 231.91,102.43 ccw(c232.54,103.06) UART.2@232.54,102.169
V3.3: C5.1 C6.1 C7.1 C9.1 C12.2 C14.1 C18.1 C19.1 D2.1 Jlink.1 L1.1 R1.2 R3.1 R5.1 R6.2 R8.2 U1.2 U1.4 U3.1 U3.24 U3.36 U3.48 U8.3 UART.4 | length 153.1
  Top Layer w0.3: v2@224.273,111.577 ccw(c223.605,112.245) 224.55,112.245 ; v2@224.55,111.5 U3.24 ; U3.36 v2(232.75,111.35) ; U3.1 v2(232.75,119.45) U3.48@232.75,118.25 ; v2@232.573,111.173 ccw(c232.146,110.746) 232.146,111.35 ccw(c232.146,111.954) v2@232.573,111.527 ; v2@232.573,119.627 cw(c232.146,120.054) 232.146,119.45 cw(c232.146,118.846) 232.573,119.273 cw(c232.146,118.846) 232.75,118.846 cw(c233.354,118.846) v2@232.927,119.273 ; U3.48 ccw(c232.409,118.391) 232.75,118.391
  Top Layer w0.5: U8.3 C12.2@214.865,135.435 ; 213.607,135.435 cw(c213.607,134.007) C12.2@214.617,135.017 ; C12.2@214.261,135.435 ccw(c214.261,135.939) C12.2@214.617,135.583 ; R6.2 221.7,100.1 223.2,101.6 223.2,104.3 222.4,105.1 ; R3.1 221.7,105.8 222.4,105.1 ; R6.2@220.583,99.817 cw(c221.266,99.134) 221.266,100.1 cw(c221.266,101.066) R6.2@220.583,100.383 ; R3.1@220.583,105.517 cw(c221.266,104.834) 221.266,105.8 cw(c221.266,106.766) R3.1@220.583,106.083 ; L1.1@221.117,127.983 ccw(c220.434,128.666) 221.4,128.666 ccw(c222.366,128.666) L1.1@221.683,127.983 ; C19.1 v2(224.45,111.4) v2@224.55,111.5 ; L1.1 221.4,131 222,131.6 ; C19.1@221.562,111.038 cw(c222.436,110.164) 222.436,111.4 cw(c222.436,112.636) C19.1@221.562,111.762 ; 222.4,111.25 222.4,105.1 ; 228,134.2 228,132.2 228.6,131.6 ; v2(232.75,119.45) 241.05,119.45
  Top Layer w1: C12.2 217.3,135.3 217.8,134.8 217.8,132 218.2,131.6 222,131.6 228.6,131.6 R5.1 ; UART.4 239.2,103.38 Jlink.1 240.1,107.6 241.2,108.7 v2(241.2,140.4) ; Jlink.1@239.2,107.85 ccw(c239.2,110.626) 241.163,108.663
  Bottom Layer w0.3: 232.4,111.7 v2(232.75,111.35)
  Bottom Layer w0.5: v2(224.45,111.4) C5.1@224.45,113.05 ; v2@224.45,111.489 cw(c226.611,111.489) C5.1@225.083,113.017 ; C5.1@224.45,112.696 cw(c225.404,112.696) C5.1@224.729,113.371
  Bottom Layer w1: 224.8,112.2 225.4,111.6 C6.1 232,111.6 232.4,112 C7.1 232.75,117.75 v2(232.75,119.45) ; C5.1@224.8,113.05 C5.1 ; 231.5,111.1 cw(c232.44,110.16) v2@232.775,111.447 ; C7.1@232.294,117.606 ccw(c231.193,118.707) 232.75,118.707 ; v2(234.3,140.4) v2(235.5,140.4) v2(241.2,140.4) v2(241.2,139.1) ; 232.388,111.6 cw(c232.388,110.988) 232.821,111.421 ccw(c232.388,110.988) 232.388,111.6 ; 232.4,111.954 ccw(c233.354,111.954) 232.679,111.279 cw(c233.354,111.954) 232.4,111.954
V5: CAN1.2 CAN2.3 F1.2 | length 9.2
  Top Layer w1: CAN1.2 203.6,136.8 206.45,139.65 F1.2 ; 205.399,138.599 ccw(c203.948,140.05) F1.2@206,140.05
  other v2: 200.5,136.8
V5A: C1.1 C11.1 C13.1 C15.1 C16.1 C17.1 F1.1 U1.3 U2.4 U6.4 | length 48.4
  Top Layer w0.4: v2(205.6,114.8) 206.25,115.45 U6.4 ; v2@205.6,115 ccw(c205.6,115.483) 205.941,115.141 ccw(c206.283,114.8) v2@205.8,114.8 ; v2(205.6,125.2) 206.05,125.65 U2.4
  Top Layer w0.5: v2(205.6,128.6) 205.6,130.8 206.2,131.4 208.8,131.4 209.4,132 209.4,139.85 F1.1 ; 209.4,136.067 cw(c214.333,136.067) F1.1@210.845,139.555 ; 209.4,137.274 cw(c213.126,137.274) F1.1@210.491,139.909 ; 209.4,138.481 cw(c211.919,138.481) F1.1@210.138,140.262 ; F1.1@209.4,139.688 cw(c210.712,139.688) F1.1@209.784,140.616
  Top Layer w1: C17.1 213.25,139.55 215.5,137.3 U1.3 ; C17.1@213.7,140.05 ccw(c215.993,140.05) 214.372,138.428
  Bottom Layer w0.5: C11.1@205.238,126.962 ccw(c204.364,127.836) 205.6,127.836 ccw(c206.836,127.836) C11.1@205.962,126.962 ; C11.1 v2(205.6,128.6)
VIN1: Input.1 U2.3 | length 18.6
  Top Layer w0.4: Input.1@200.917,118.083 ccw(c199.269,119.731) 201.6,119.731 ; 201.6,118.766 cw(c200.234,118.766) Input.1 201.6,118.2 201.6,125.6 202.3,126.3 U2.3
VIN2: Input.2 U2.5 | length 16.3
  Top Layer w0.4: Input.2 203.2,115.8 205,117.6 205,123 207,125 U2.5 ; Input.2@202.483,115.517 cw(c203.166,114.834) 203.166,115.8 cw(c203.166,116.766) Input.2@202.483,116.083
VIN3: Input.3 U6.3 | length 11
  Top Layer w0.4: Input.3 202.6,113.8 204.9,116.1 U6.3 ; Input.3@202.2,113.8 ccw(c202.2,114.766) 202.883,114.083 ; Input.3@202.2,114.2 ccw(c202.2,116.131) 203.566,114.766
VIN4: Input.4 U6.5 | length 10.6
  Top Layer w0.4: Input.4 204.4,111.8 207.4,114.8 U6.5 ; Input.4@202.483,111.517 cw(c203.166,110.834) 203.166,111.8 cw(c203.166,112.766) Input.4@202.483,112.083
VOUT1: U2.13 U2.14 U3.16 | length 18.9
  Top Layer w0.254: U2.13 217.65,126.95 218.3,126.3 218.3,117.3 218.95,116.65 U3.16
VOUT2: U2.8 U2.9 U3.17 | length 16.1
  Top Layer w0.254: U2.8 217.1,123.7 217.7,123.1 217.7,116.9 218.45,116.15 U3.17
VOUT3: U3.18 U6.13 U6.14 | length 9.8
  Top Layer w0.254: U6.13 216.85,116.75 217.95,115.65 U3.18
VOUT4: U3.19 U6.8 U6.9 | length 9.8
  Top Layer w0.254: U6.9 216.95,114.15 217.95,115.15 U3.19
pads on no net: CAN2.0 U3.2 U3.3 U3.4 U3.10 U3.11 U3.12 U3.14 U3.15 U3.20 U3.21 U3.22 U3.25 U3.26 U3.29 U3.32 U3.38 U3.39 U3.40 U3.41 U8.5
copper on no net: | length 24.2
  Top Layer w0.2: 227.997,97.003 227.997,99.097 228.7,99.8 237.5,99.8 237.5,97.003 227.997,97.003

## Polygon pours and split planes (outlines as drawn)
GND on Top Layer "Bottom Overlay-No Net" (hatched 45Degree grid 0.508 track 0.203, remove dead copper): 192.8,146.4 242.8,146.4 242.8,96.4 212.9,96.4 212.9,109.2 192.8,109.2
GND on Bottom Layer "Bottom Overlay-No Net" (hatched 45Degree grid 0.508 track 0.203, remove dead copper): 192.8,146.4 242.8,146.4 242.8,96.4 192.8,96.4

## Keep-outs
Keep-Out Layer:
  lines w0.254: 192.8,97.67 ccw(c194.07,97.67) 194.07,96.4 241.53,96.4 ccw(c241.53,97.67) 242.8,97.67 242.8,145.13 ccw(c241.53,145.13) 241.53,146.4 195.2,146.4 194.07,146.4 ccw(c194.07,145.13) 192.8,145.13 192.8,97.67

## Other copper
Top Layer:
  rectangle net GND: 210.2,113 212.3,118
  rectangle net GND: 210.2,123.2 212.3,128.2
  rectangle net V3.3: 220.8,127.8 222.1,131.3
  rectangle net V3.3: 226.5,131.6 229.9,133.7
  rectangle net V3.3: 220.4,110.6 225.1,112.7
  rectangle net GND: 216.2,98.2 218.2,100
  rectangle net V5A: 209.4,139.2 214,142.4
  rectangle net V5A: 219.4,133.4 221.8,137.8
  rectangle net GND: 214.2,119.4 215.4,122.4
  rectangle net GND: 225.8,112.6 231.4,118.2
  rectangle net V3.3: 236.8,107 239.8,108.2
  rectangle net V3.3: 236,107 237.2,109.4
  rectangle net NetD2_2: 234,104.6 237,105.6
  rectangle net TIM4_CH2: 217.4,102 221,102.8
  rectangle net TIM4_CH1: 217.4,107.4 220.4,108.4
  rectangle net GND: 229.4,126.8 233.2,128.4
  rectangle net AGND: 222.8,121.6 224,128.4
  rectangle net NetC8_1: 219,121.6 221.4,123.2
  rectangle net NetC8_1: 219,121.6 220,128.2
  rectangle net VOUT4: 214.6,113.4 215.8,114.2
  rectangle net VOUT3: 214.6,116.8 215.8,117.4
  rectangle net VOUT2: 214.6,123.6 215.8,124.4
  rectangle net VOUT1: 214.6,126.95 215.8,127.6
  rectangle net NetR16_1: 210,118.6 213.6,120.2
  rectangle net NetR12_1: 210.2,110.6 213.6,112.2
  rectangle net NetR12_2: 208.4,110.6 209.6,114.2
  rectangle net NetR16_2: 208.4,116.6 209.6,120.2
  rectangle net NetR10_1: 210.2,121 213.6,122.6
  rectangle net NetR10_2: 208.4,121.2 209.6,124.35
  rectangle net NetR14_1: 210.6,128.8 213.6,130.4
  rectangle net NetR14_2: 208.4,127 209.6,129.8
  rectangle net NRST: 233,129 239.8,130.4
  rectangle net V3.3: 226.2,133.6 227.6,138.4
  rectangle net GND: 223,133.4 225.6,135
  rectangle net V3.3: 226.2,133.4 230,135
  rectangle net NetD1_1: 230.6,133.4 234.2,135
  rectangle net GND: 234.8,131.6 236.2,136.4
  rectangle net GND: 228.6,135.6 239,137.6
  rectangle net V3.3: 226,139.6 236.2,141.6
  rectangle net V3.3: 220.2,139 226.8,140.2
  rectangle net GND: 216.2,141.2 221,144.4
  text "Apache" at 228.5,97.8 h1.5
Bottom Layer:
  rectangle net V5A: 205,113.8 206.2,127
  rectangle net GND: 201.4,112.8 203.2,117
  rectangle net GND: 201.4,115.6 203.2,127.4
  rectangle net GND: 225.8,112.6 231.4,118.2

## Silkscreen, mask and mechanical layers (free items; w line width, h text height)
Top Overlay:
  text "47u" at 216.1,143.1 h1
  text "LT1117" at 222.2,142.1 h1 r270
  text "47u" at 235.3,142 h1
  text "10K" at 215.6,130.9 h1
  text "5.6K" at 204,130.8 h1
  text "330" at 228.6,130.7 h1
  text "0" at 225.6,128.9 h1
  text "BEAD" at 218.4,126.9 h1 r90
  text "2254" at 210.3,125.1 h1
  text "0.1%" at 206.3,121.1 h1 r90
  text "10K" at 219.7,120.4 h1 r90
  text "103" at 219.6,118.8 h1
  text "5.6K" at 206.3,116.8 h1 r90
  text "2254" at 210.3,115 h1
  text "106" at 219.9,113.2 h1
  text "5.6K" at 204.4,110.9 h1
  text "1K" at 206.1,109.1 h1
  text "10K" at 215.3,108.8 h1
  text "STM32" at 228.7,108.8 h1
  text "10K" at 235.4,108.5 h1 r90
  text "521" at 211.9,106.3 h1
  text "330" at 231.9,104.1 h1 r90
  text "1K" at 206.1,103.6 h1
  text "521" at 211.9,100.6 h1
  text "10K" at 220.8,97.9 h1
Bottom Overlay:
  drawing of 914 lines, arcs and shapes, not listed
  text "Harbin Institute of Technology" at 237.3,144.6 h1
  text "Racing Team" at 237.3,143 h1
  text "Vehicle Data Recorder CAN-NODE V4.1" at 237.3,141.2 h1
  text "2013.5.7" at 216.2,139.2 h1
  text "GND" at 198.5,138.3 h1
  text "G" at 204.6,138.3 h1
  text "5" at 204.6,136.4 h1
  text "5V" at 198.5,136.3 h1
  text "L" at 204.5,134.5 h1
  text "CANL" at 198.5,134.3 h1
  text "CANH" at 198.6,132.4 h1
  text "H" at 204.5,132.3 h1
  text "106" at 197.9,125.4 h1 r270
  text "AIN1" at 197,117.4 h1
  text "GND" at 237,117.2 h1 r270
  text "AIN2" at 197.1,115.4 h1
  text "102" at 235.4,115.2 h1
  text "106" at 197.8,115 h1 r270
  text "CLK" at 237,113.8 h1 r270
  text "AIN3" at 197.1,113.4 h1
  text "DIO" at 237.7,112.2 h1
  text "103" at 223.4,111.5 h1
  text "AIN4" at 197.1,111.4 h1
  text "RST" at 237.7,109.7 h1
  text "GND" at 197.1,109.3 h1
  text "104" at 231.5,107.9 h1
  text "DIN1" at 197.1,107.3 h1
  text "3.3" at 237.7,107.1 h1
  text "DIN2" at 197.1,105.4 h1
  text "D-GND" at 198.2,103.3 h1
  text "GND" at 229.4,97.4 h1 r270
  text "TxD" at 232.1,97.4 h1 r270
  text "RxD" at 234.6,97.4 h1 r270
  text "3.3" at 237.2,97.4 h1 r270
  text "X.J.Y" at 198.2,97.2 h1
Top Solder:
  rectangle: 227.9,96.9 228.8,99.1
  region: 228.536,98.464 229.336,99.264 228.7,99.9 227.9,99.1
  rectangle: 228.7,96.9 237.6,99.9